# EAGLE board main_board1 (EAGLE 9.2.2)
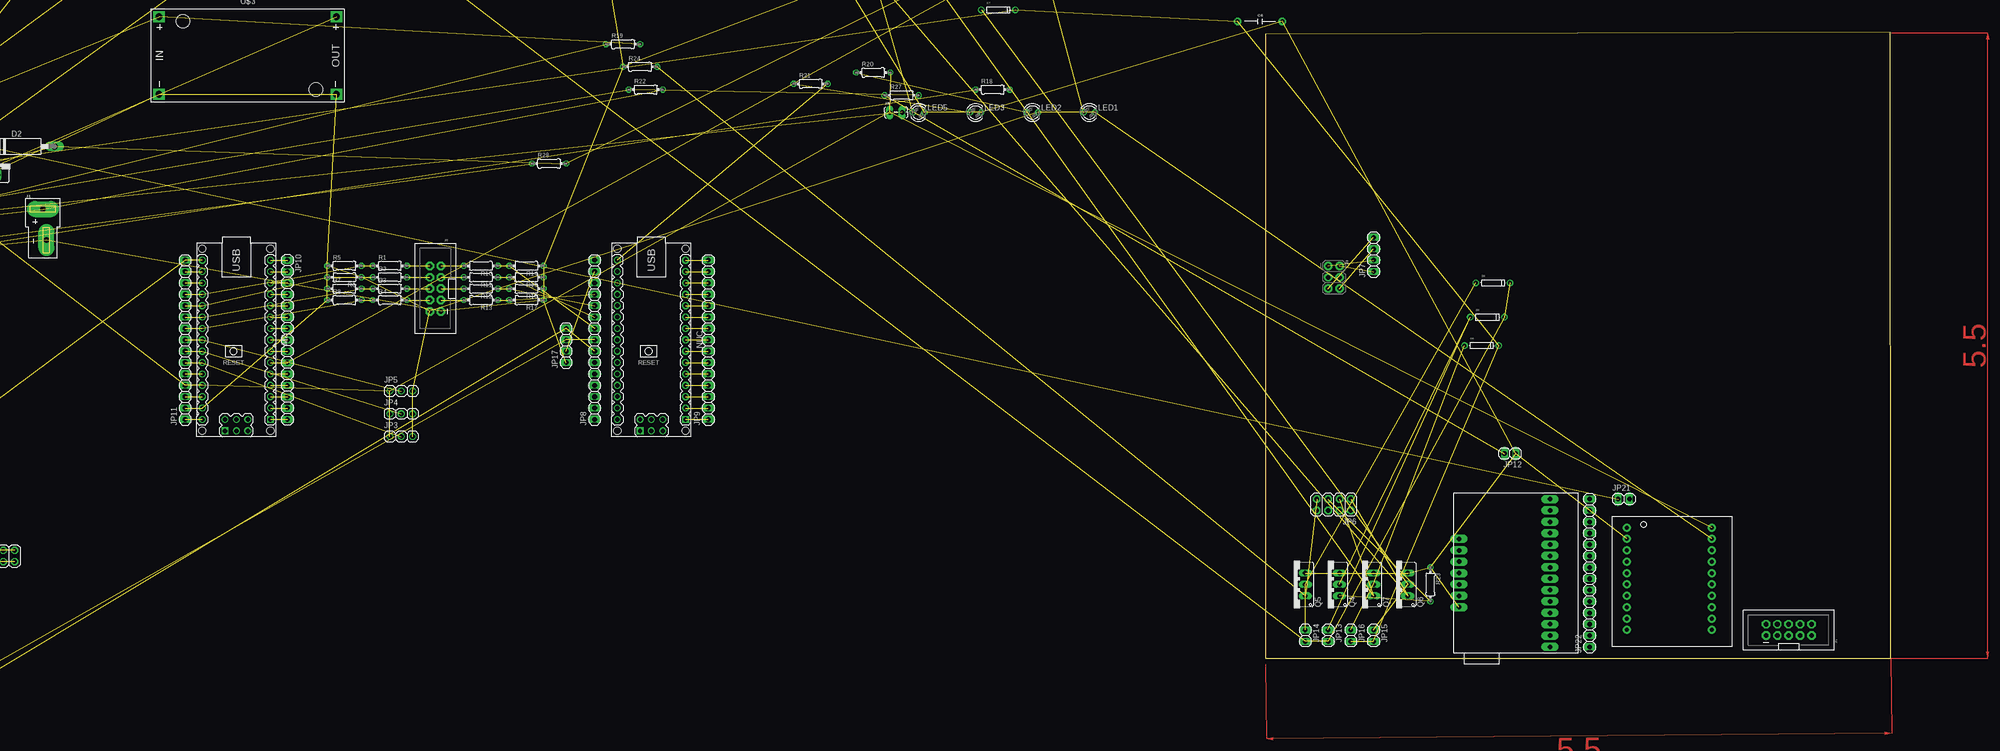
[diagram p0: board, top side]
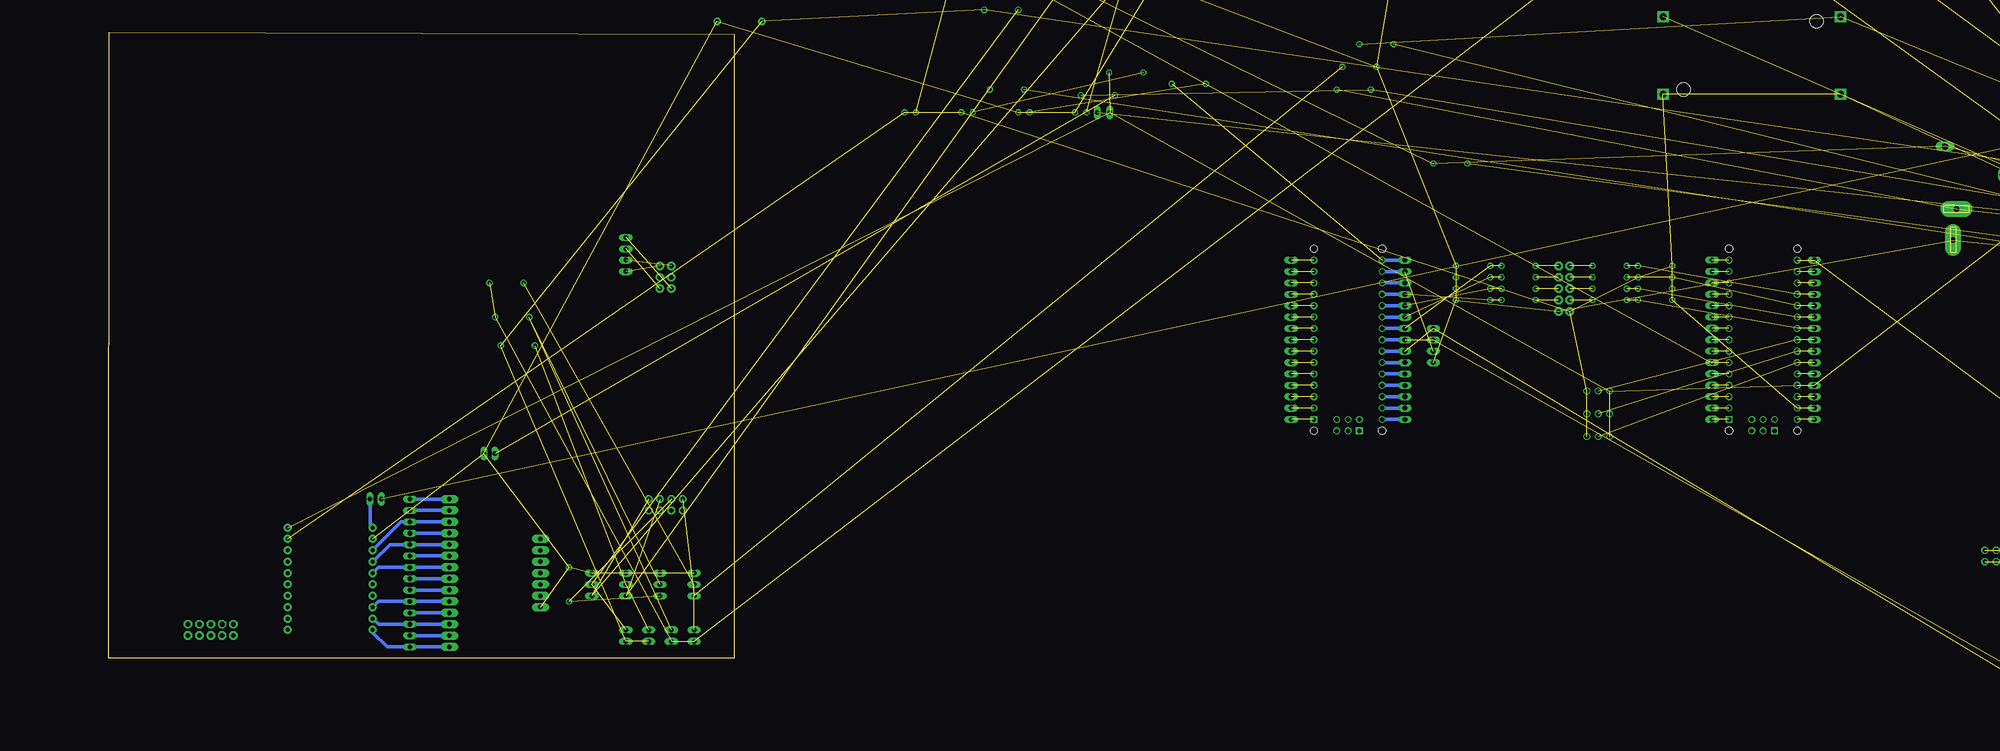
[diagram p1: board, bottom side, seen from below]

Size 415.57 x 139.75 mm. Coordinates in mm from the lower left corner, seen from the top.
Outline: 275.89,0 415.57,0 415.45,139.75 275.89,139.37 275.89,0
Copper layers (1*16): Top 0.035mm / dielectric 1.5mm / Bottom 0.035mm
Design rules "default": minimum track width 6mil, minimum drill 0.35mm, track to track 6mil, track to pad 6mil, pad to pad 6mil, via to via 6mil, smd to smd 6mil, copper to edge 40mil, drill to drill 6mil, minimum pad ring 10mil, minimum via ring 8mil, stop-mask expansion 4mil, vias tented up to drill 0mil, thermal gap 10mil

## Footprints (pad centres in the part's own frame; a part is rotated, then mirrored left to right if it is on the bottom)
CAP-PTH-10MM = drill 0.9 pad 1.651: 1 -5,0; 2 5,0
CB417-15 = drill 1.397 long: A 7.62,0; C -7.62,0
DO-1N4148 = drill 0.9: A -3.81,0; C 3.81,0
78MXXS = drill 1.016 long: GND 0,-2.54; IN -2.54,-2.54; OUT 2.54,-2.54
78XXS = drill 1.016 long: GND 0,-2.54; IN -2.54,-2.54; OUT 2.54,-2.54
DEANS = drill 1.27 pad 3.556 long: + 0,0; - 0.737,-6.921
2X3-NS = drill 1.016 pad 1.88: 1 -2.54,-1.27; 2 -2.54,1.27; 3 0,-1.27; 4 0,1.27; 5 2.54,-1.27; 6 2.54,1.27
1X02_LOCK_LONGPADS = drill 1.016 long: 1 -0.127,0; 2 2.667,0
1X2-3.5MM = drill 1 pad 2.184: 1 1.8,0; 2 -1.7,0
2X5-SHROUDED = drill 1.016 pad 1.88 octagon: 1 -1.27,5.08; 2 1.27,5.08; 3 -1.27,2.54; 4 1.27,2.54; 5 -1.27,0; 6 1.27,0; 7 -1.27,-2.54; 8 1.27,-2.54; 9 -1.27,-5.08; 10 1.27,-5.08
1X03 = drill 1.016: 1 -2.54,0; 2 0,0; 3 2.54,0
2X04 = drill 1.016 pad 1.676 octagon: 1 -3.81,-1.27; 2 -3.81,1.27; 3 -1.27,-1.27; 4 -1.27,1.27; 5 1.27,-1.27; 6 1.27,1.27; 7 3.81,-1.27; 8 3.81,1.27
1X04 = drill 1.016 long: 1 -3.81,0; 2 -1.27,0; 3 1.27,0; 4 3.81,0
1X15 = drill 1.016 long: 1 -17.78,0; 2 -15.24,0; 3 -12.7,0; 4 -10.16,0; 5 -7.62,0; 6 -5.08,0; 7 -2.54,0; 8 0,0; 9 2.54,0; 10 5.08,0; 11 7.62,0; 12 10.16,0; 13 12.7,0; 14 15.24,0; 15 17.78,0
1X02 = drill 1.016 long: 1 -1.27,0; 2 1.27,0
2X05 = drill 1.016 octagon: 1 -5.08,-1.27; 2 -5.08,1.27; 3 -2.54,-1.27; 4 -2.54,1.27; 5 0,-1.27; 6 0,1.27; 7 2.54,-1.27; 8 2.54,1.27; 9 5.08,-1.27; 10 5.08,1.27
1X14 = drill 1.016 long: 1 -16.51,0; 2 -13.97,0; 3 -11.43,0; 4 -8.89,0; 5 -6.35,0; 6 -3.81,0; 7 -1.27,0; 8 1.27,0; 9 3.81,0; 10 6.35,0; 11 8.89,0; 12 11.43,0; 13 13.97,0; 14 16.51,0
LED3MM = drill 0.813 octagon: A -1.27,0; K 1.27,0
ARDUINO-NANO-3.0#ISP = drill 1 square: J1.1 17.78,7.62; J4.1 20.32,-2.54 | drill 1: J1.2 15.24,7.62; J1.3 12.7,7.62; J1.4 10.16,7.62; J1.5 7.62,7.62; J1.6 5.08,7.62; J1.7 2.54,7.62; J1.8 0,7.62; J1.9 -2.54,7.62; J1.10 -5.08,7.62; J1.11 -7.62,7.62; J1.12 -10.16,7.62; J1.13 -12.7,7.62; J1.14 -15.24,7.62; J1.15 -17.78,7.62; J2.1 17.78,-7.62; J2.2 15.24,-7.62; J2.3 12.7,-7.62; J2.4 10.16,-7.62; J2.5 7.62,-7.62; J2.6 5.08,-7.62; J2.7 2.54,-7.62; J2.8 0,-7.62; J2.9 -2.54,-7.62; J2.10 -5.08,-7.62; J2.11 -7.62,-7.62; J2.12 -10.16,-7.62; J2.13 -12.7,-7.62; J2.14 -15.24,-7.62; J2.15 -17.78,-7.62; J4.2 17.78,-2.54; J4.3 20.32,0; J4.4 17.78,0; J4.5 20.32,2.54; J4.6 17.78,2.54 | hole 1.651: -20.32,7.62; -20.32,-7.62; 20.32,-7.62; 20.32,7.62
DIL04 = drill 0.813 offset: 1 -1.27,-3.81; 2 1.27,-3.81; 3 1.27,3.81; 4 -1.27,3.81
TO220V = drill 1.016 long: 1 -2.54,0; 2 0,0; 3 2.54,0
TO92-EBC = drill 0.813 long: B 0,-1.27; C -2.54,-1.27; E 2.54,-1.27
TO220V' = drill 1.016 long: 1 -2.54,-2.54; 2 0,-2.54; 3 2.54,-2.54
0204/7 = drill 0.813 octagon: 1 -3.81,0; 2 3.81,0
DC-DC-STEP-DOWN-LM2596 = drill 1.5 pad 2.5 square: IN+ -19.812,8.636; IN- -19.812,-8.636; OUT+ 19.812,8.636; OUT- 19.812,-8.636 | hole 3: -14.478,7.62; 15.24,-7.62
TSOP3XXX = drill 1 pad 1.93 long: 1 -2.54,0; 2 0,0; 3 5.08,0
SERVO_CONTROLLER = drill 1 pad 1.93 long: 0 6.35,34.29; 1 6.35,31.75; 2 6.35,29.21; 3 6.35,26.67; 4 6.35,24.13; 5 6.35,21.59; 6 6.35,16.51; 7 6.35,13.97; 8 6.35,11.43; 9 6.35,8.89; 10 6.35,6.35; 11 6.35,3.81; +5V(OUT) 6.35,19.05; ERR 26.67,12.7; GND 26.67,25.4; RST' 26.67,15.24; RX 26.67,20.32; TX 26.67,17.78; TXIN 26.67,10.16; VIN 26.67,22.86; VSRV 6.35,1.27
DIGITAL_ISOLATOR_MODULE = drill 0.9 pad 1.778: 1 3.175,26.67; 2 3.175,24.13; 3 3.175,21.59; 4 3.175,19.05; 5 3.175,16.51; 6 3.175,13.97; 7 3.175,11.43; 8 3.175,8.89; 9 3.175,6.35; 10 3.175,3.81; 11 22.225,3.81; 12 22.225,6.35; 13 22.225,8.89; 14 22.225,11.43; 15 22.225,13.97; 16 22.225,16.51; 17 22.225,19.05; 18 22.225,21.59; 19 22.225,24.13; 20 22.225,26.67

## Placement (x,y rotation side)
C6  10nF  [CAP-PTH-10MM]  274.62,142.24 0 top
C7  10nF  [CAP-PTH-10MM]  -119.08,-127 0 top  (outside the outline)
C8  10nF  [CAP-PTH-10MM]  -119.08,-130.81 0 top  (outside the outline)
D2  SCOTTKY  [CB417-15]  -2.24,114.3 0 top
D5  [DO-1N4148]  325.42,76.2 0 top
D6  [DO-1N4148]  326.69,83.82 0 top
D7  [DO-1N4148]  216.2,144.78 0 top  (outside the outline)
D8  [DO-1N4148]  324.15,69.85 0 top
IC2  7812  [78MXXS]  -119.08,-93.98 0 top  (outside the outline)
IC3  [78XXS]  -9.86,110.49 0 top  (outside the outline)
IC4  [78XXS]  -21.29,110.49 0 top  (outside the outline)
IC5  [78XXS]  -32.72,110.49 0 top  (outside the outline)
J1  [DEANS]  2.84,100.33 0 top
J3  [2X3-NS]  291.13,85.09 270 top
J5  [1X02_LOCK_LONGPADS]  192.07,121.92 0 top
J6  1X2-3.5MM  [1X2-3.5MM]  -121.62,-109.22 0 top  (outside the outline)
JP1  M05X2SHD  [2X5-SHROUDED]  392.73,6.35 90 top
JP2  M05X2SHD  [2X5-SHROUDED]  90.47,82.55 180 top
JP3  [1X03]  82.85,49.53 0 top
JP4  [1X03]  82.85,54.61 0 top
JP5  Temp Sensor  [1X03]  82.85,59.69 0 top
JP6  [2X04]  291.13,34.29 180 top
JP7  [1X04]  300.02,90.17 90 top
JP8  [1X15]  126.03,71.12 90 top
JP9  [1X15]  151.43,71.12 90 top
JP10  [1X15]  57.45,71.12 270 top
JP11  [1X15]  34.59,71.12 90 top
JP12  [1X02]  330.5,45.72 180 top
JP13  [1X02]  289.86,5.08 270 top
JP14  [1X02]  284.78,5.08 270 top
JP15  [1X02]  300.02,5.08 270 top
JP16  [1X02]  294.94,5.08 270 top
JP17  [1X04]  119.68,69.85 90 top
JP18  Extra Reed  [1X02]  -105.11,-21.59 0 top  (outside the outline)
JP19  [2X05]  -8.59,22.86 0 top  (outside the outline)
JP20  [2X05]  -101.3,-38.1 0 top  (outside the outline)
JP21  [1X02]  355.9,35.56 0 top
JP22  [1X14]  348.28,19.05 90 top
JP23  [1X02]  -121.62,-123.19 0 top  (outside the outline)
LED1  LED3MM  [LED3MM]  236.52,121.92 0 top
LED2  LED3MM  [LED3MM]  223.82,121.92 0 top
LED3  LED3MM  [LED3MM]  211.12,121.92 0 top
LED4  LED3MM  [LED3MM]  -105.11,-5.08 0 top  (outside the outline)
LED5  LED3MM  [LED3MM]  198.42,121.92 0 top
LED6  LED3MM  [LED3MM]  -114,-53.34 0 top  (outside the outline)
M2  ARDUINO-NANO-3.0#ISP  [ARDUINO-NANO-3.0#ISP]  46.02,71.12 270 top
NUC  [ARDUINO-NANO-3.0#ISP]  138.73,71.12 270 top
OC_EN  SFH610  [DIL04]  -16.21,95.25 0 top  (outside the outline)
OC_POW  SFH610  [DIL04]  -26.37,95.25 0 top  (outside the outline)
Q1  MOSFET-PCHANNELFQP27P06  [TO220V]  -67.01,92.71 0 top  (outside the outline)
Q2  MOSFET-PCHANNELFQP27P06  [TO220V]  -97.49,92.71 0 top  (outside the outline)
Q3  BC548  [TO92-EBC]  -114,-35.56 0 top  (outside the outline)
Q4  [TO220V']  289.86,16.51 90 top
Q5  [TO220V']  282.24,16.51 90 top
Q6  [TO220V']  305.1,16.51 90 top
Q7  [TO220V']  297.48,16.51 90 top
R1  [0204/7]  80.31,87.63 0 top
R2  [0204/7]  80.31,85.09 0 top
R3  [0204/7]  80.31,82.55 0 top
R4  [0204/7]  80.31,80.01 0 top
R5  [0204/7]  70.15,87.63 0 top
R6  [0204/7]  70.15,85.09 180 top
R7  [0204/7]  70.15,82.55 0 top
R8  [0204/7]  70.15,80.01 0 top
R9  [0204/7]  222.55,154.94 180 top  (outside the outline)
R10  [0204/7]  100.63,87.63 180 top
R11  [0204/7]  100.63,85.09 180 top
R12  [0204/7]  100.63,82.55 180 top
R13  [0204/7]  100.63,80.01 180 top
R14  [0204/7]  110.79,87.63 180 top
R15  [0204/7]  110.79,85.09 180 top
R16  [0204/7]  110.79,82.55 180 top
R17  [0204/7]  110.79,80.01 180 top
R18  [0204/7]  214.93,127 0 top
R19  [0204/7]  132.38,137.16 0 top
R20  [0204/7]  188.26,130.81 0 top
R21  [0204/7]  174.29,128.27 0 top
R22  [0204/7]  137.46,127 0 top
R23  [0204/7]  312.72,16.51 270 top
R24  [0204/7]  136.19,132.08 0 top
R25  [0204/7]  185.72,151.13 0 top  (outside the outline)
R26  [0204/7]  190.8,161.29 0 top  (outside the outline)
R27  [0204/7]  194.61,125.73 0 top
R28  [0204/7]  115.87,110.49 0 top
R29  [0204/7]  193.34,148.59 0 top  (outside the outline)
R30  [0204/7]  -102.57,-10.16 0 top  (outside the outline)
R31  [0204/7]  -112.73,-44.45 0 top  (outside the outline)
R32  [0204/7]  -112.73,-49.53 0 top  (outside the outline)
R33  [0204/7]  -112.73,-58.42 0 top  (outside the outline)
R34  [0204/7]  -112.73,-63.5 0 top  (outside the outline)
U$1  DC-DC-STEP-DOWN-LM2596  [DC-DC-STEP-DOWN-LM2596]  53.64,204.47 180 top  (outside the outline)
U$2  DC-DC-STEP-DOWN-LM2596  [DC-DC-STEP-DOWN-LM2596]  101.9,204.47 0 top  (outside the outline)
U$3  DC-DC-STEP-DOWN-LM2596  [DC-DC-STEP-DOWN-LM2596]  48.56,134.62 0 top
U$5  TSOP34X  [TSOP3XXX]  -37.8,93.98 0 top  (outside the outline)
U$6  SERVO_CONTROLLER  [SERVO_CONTROLLER]  345.74,36.83 180 top
U$7  DIGITAL_ISOLATOR  [DIGITAL_ISOLATOR_MODULE]  353.36,2.54 0 top

## Library data of the parts
C6-C8 = SparkFun-Capacitors; PROD_ID: CAP-09321
D2 D5-D8 J6 JP3-JP6 JP8-JP11 Q4-Q7 = adafruit
IC2-IC5 = v-reg
J1 = SparkFun-Connectors; SF_ID: PRT-11864
J3 J5 JP1 JP2 = SparkFun-Connectors
JP7 JP12-JP23 = pinhead
LED1-LED6 U$5 = CEDT_JANUARY_2015_v5
M2 NUC U$1-U$3 = diy-modules
OC_EN OC_POW = optocoupler; MF: VISHAY/TELEFUNKEN; MPN: SFH6106-4; OC_FARNELL: 1469568; OC_NEWARK: 58K2193
Q1 Q2 = SparkFun-DiscreteSemi
Q3 = transistor-npn
R1-R34 = rcl; SPICEPREFIX: R
U$6 = Servo Controller
U$7 = ISO7330C DIGITAL ISOLATOR MODULE

## Nets
DR1: JP6.1 Q6.1 R25.2
DR1_IN: JP6.2
DR2: JP6.3 Q7.1 R26.2
DR2_IN: JP6.4
E16.8V: Q2.2 Q2.3 R19.2 U$3.IN+
EA0: JP11.12 M2.J2.12 R1.1 R5.2
EA1: JP11.11 M2.J2.11 R2.1 R6.2
EA2: JP11.10 M2.J2.10 R3.1 R7.2
EA3: JP11.9 M2.J2.9 R4.1 R8.2
ED3: JP10.10 M2.J1.6 R9.2
EN: J5.2 OC_EN.4 R31.2
ENLED: R18.2
GNDE: IC3.GND JP2.2 JP3.3 JP4.3 JP5.3 JP11.2 LED1.K LED2.K LED4.K M2.J2.2 OC_POW.4 Q3.E R5.1 R6.1 R7.1 R8.1 U$3.IN- U$3.OUT- U$7.19
GNDN: C6.2 C7.2 C8.2 IC2.GND IC4.GND IC5.GND J1.- J6.2 JP2.1 JP12.1 JP17.1 JP18.1 JP19.2 JP19.4 JP19.6 JP19.8 JP19.10 JP20.2 JP20.4 JP20.6 JP20.8 JP20.10 LED3.K LED5.K OC_EN.2 OC_POW.2 Q4.3 Q5.3 Q6.3 Q7.3 R14.1 R15.1 R16.1 R17.1 R23.1 R24.1 R25.1 R26.1 U$1.IN- U$1.OUT- U$2.IN- U$2.OUT- U$5.1 U$6.GND U$7.2
GR1_IN: J3.3
GR2_IN: J3.4
N6V: C6.1 D7.C D8.C IC5.OUT JP15.2 JP16.2
N12V: D5.C D6.C IC5.IN JP13.2 JP14.2 JP20.1 JP20.3 JP20.5 JP20.7 JP20.9 U$1.OUT+
N$1: JP10.11 M2.J1.5
N$2: OC_EN.1 R18.1
N$4: JP9.1 NUC.J1.1
N$5: JP9.2 NUC.J1.2
N$6: JP9.3 NUC.J1.3
N$7: LED1.A R9.1
N$8: JP2.10 R1.2
N$9: JP2.8 R2.2
N$10: JP2.6 R3.2
N$11: JP2.4 R4.2
N$12: JP8.7 JP17.4 NUC.J2.7 R34.2
N$13: JP8.8 JP17.3 NUC.J2.8 R33.2
N$14: JP9.4 NUC.J1.4
N$15: JP9.5 NUC.J1.5
N$16: JP2.9 R10.2
N$17: JP2.7 R11.2
N$18: JP2.5 R12.2
N$19: JP2.3 R13.2
N$20: JP9.6 NUC.J1.6
N$21: OC_POW.3 Q2.1 R19.1
N$22: JP9.7 NUC.J1.7
N$23: IC3.IN U$3.OUT+
N$24: JP22.10 U$6.8 U$7.4
N$26: LED2.A R20.1
N$31: Q3.B R31.1
N$32: D2.C JP21.1
N$34: JP9.8 NUC.J1.8
N$35: JP22.1 U$6.0 U$7.10
N$36: C7.1 IC2.IN J1.+ Q1.3 R22.2
N$37: C8.1 IC2.OUT J6.1
N$38: JP22.2 U$6.1
N$39: JP9.9 NUC.J1.9
N$40: JP9.10 NUC.J1.10
N$41: LED4.A R30.1
N$42: JP11.1 M2.J2.1
N$43: JP9.11 NUC.J1.11
N$44: JP9.12 NUC.J1.12
N$45: JP9.13 NUC.J1.13
N$46: JP9.14 NUC.J1.14
N$47: JP8.4 NUC.J2.4
N$48: JP9.15 NUC.J1.15
N$49: JP22.3 U$6.2 U$7.9
N$50: J3.6 JP7.3
N$51: J3.2 JP7.1
N$52: J3.1 JP7.2
N$53: J3.5 JP7.4
N$54: JP8.1 NUC.J2.1
N$55: JP8.2 NUC.J2.2
N$56: JP8.3 NUC.J2.3
N$57: JP21.2 U$7.1
N$58: JP8.5 NUC.J2.5
N$59: JP8.6 NUC.J2.6
N$60: JP22.4 U$6.3
N$61: JP22.5 U$6.4 U$7.8
N$62: JP8.13 NUC.J2.13
N$63: JP8.14 JP17.2 NUC.J2.14
N$64: JP8.15 NUC.J2.15 R21.2
N$65: LED3.A R21.1
N$66: JP22.6 U$6.5
N$67: JP22.7 U$6.+5V(OUT)
N$68: JP22.8 U$6.6 U$7.5
N$69: JP22.9 U$6.7
N$70: Q1.1 R22.1 R27.2
N$72: JP22.11 U$6.9
N$73: JP22.12 U$6.10 U$7.3
N$74: JP22.13 U$6.11
N$75: JP10.1 M2.J1.15
N$76: JP10.2 M2.J1.14
N$77: JP10.3 M2.J1.13
N$78: JP10.4 M2.J1.12
N$79: JP10.5 M2.J1.11
N$80: JP10.6 M2.J1.10
N$81: JP10.7 M2.J1.9
N$82: JP10.8 M2.J1.8
N$83: JP10.9 M2.J1.7
N$84: JP22.14 U$6.VSRV
N$85: JP10.12 M2.J1.4
N$86: JP10.13 M2.J1.3
N$87: JP10.14 M2.J1.2
N$88: JP10.15 M2.J1.1
N$89: JP11.15 M2.J2.15 R30.2
N$90: JP11.14 M2.J2.14
N$91: JP11.13 M2.J2.13
N$93: JP11.3 M2.J2.3
N$95: D5.A JP13.1 Q4.2
N$96: D6.A JP14.1 Q5.2
N$97: JP12.2 R27.1
N$98: D7.A JP15.1 Q6.2
N$99: D8.A JP16.1 Q7.2
N$100: IC4.IN U$2.OUT+
N$101: OC_POW.1 R28.1
N$102: Q1.2 U$1.IN+ U$2.IN+
N$104: LED5.A R29.1
N$106: LED6.K Q3.C
N$107: LED6.A R32.2
NA0: JP8.12 NUC.J2.12 R13.1 R17.2
NA1: JP8.11 NUC.J2.11 R12.1 R16.2
NA2: JP8.10 NUC.J2.10 R11.1 R15.2
NA3: JP8.9 NUC.J2.9 R10.1 R14.2
NTSOP: U$5.3
TMP1: JP5.2 JP11.8 M2.J2.8
TMP2: JP4.2 JP11.7 M2.J2.7
TMP3: JP3.2 JP11.6 M2.J2.6
TMP4: JP11.5 M2.J2.5
TP1: JP6.5 Q4.1 R23.2
TP1_IN: JP6.6
TP2: JP6.7 Q5.1 R24.2
TP2_IN: JP6.8
VCCE: IC3.OUT J5.1 JP3.1 JP4.1 JP5.1 JP11.4 JP23.1 JP23.2 M2.J2.4 OC_EN.3 R20.2 R32.1 U$7.20
VCCN: D2.A IC4.OUT JP19.1 JP19.3 JP19.5 JP19.7 JP19.9 R28.2 R29.2 R33.1 R34.1 U$5.2

## Tracks (layer width: path | path; a pad name or v marks a point on that pad's centre or on a via)
DR1  (2 unrouted)
DR2  (2 unrouted)
E16.8V  (3 unrouted)
EA0  (3 unrouted)
EA1  (3 unrouted)
EA2  (3 unrouted)
EA3  (3 unrouted)
ED3  (2 unrouted)
EN  (2 unrouted)
GNDE  (18 unrouted)
GNDN  (44 unrouted)
N6V  (5 unrouted)
N12V  (10 unrouted)
N$1  (1 unrouted)
N$2  (1 unrouted)
N$4  (1 unrouted)
N$5  (1 unrouted)
N$6  (1 unrouted)
N$7  (1 unrouted)
N$8  (1 unrouted)
N$9  (1 unrouted)
N$10  (1 unrouted)
N$11  (1 unrouted)
N$12  (2 unrouted)
  Bottom 0.813: NUC.J2.7 JP8.7
N$13  (2 unrouted)
  Bottom 0.813: JP8.8 NUC.J2.8
N$14  (1 unrouted)
N$15  (1 unrouted)
N$16  (1 unrouted)
N$17  (1 unrouted)
N$18  (1 unrouted)
N$19  (1 unrouted)
N$20  (1 unrouted)
N$21  (2 unrouted)
N$22  (1 unrouted)
N$23  (1 unrouted)
N$24
  Bottom 0.813: U$6.8 JP22.10 352.73,25.4 U$7.4
N$26  (1 unrouted)
N$31  (1 unrouted)
N$32  (1 unrouted)
N$34  (1 unrouted)
N$35
  Bottom 0.813: U$6.0 JP22.1 353.36,2.54 356.54,5.72 U$7.10
N$36  (4 unrouted)
N$37  (2 unrouted)
N$38
  Bottom 0.813: U$6.1 JP22.2
N$39  (1 unrouted)
N$40  (1 unrouted)
N$41  (1 unrouted)
N$42  (1 unrouted)
N$43  (1 unrouted)
N$44  (1 unrouted)
N$45  (1 unrouted)
N$46  (1 unrouted)
N$47
  Bottom 0.813: JP8.4 NUC.J2.4
N$48  (1 unrouted)
N$49
  Bottom 0.813: U$6.2 JP22.3 355.27,7.62 U$7.9
N$50  (1 unrouted)
N$51  (1 unrouted)
N$52  (1 unrouted)
N$53  (1 unrouted)
N$54
  Bottom 0.813: JP8.1 NUC.J2.1
N$55
  Bottom 0.813: NUC.J2.2 JP8.2
N$56
  Bottom 0.813: NUC.J2.3 JP8.3
N$57
  Bottom 0.813: U$7.1 357.17,29.84 JP21.2
N$58
  Bottom 0.813: NUC.J2.5 JP8.5
N$59
  Bottom 0.813: JP8.6 NUC.J2.6
N$60
  Bottom 0.813: U$6.3 JP22.4
N$61
  Bottom 0.813: U$6.4 JP22.5 355.27,12.7 U$7.8
N$62
  Bottom 0.813: JP8.13 NUC.J2.13
N$63  (1 unrouted)
  Bottom 0.813: NUC.J2.14 JP8.14
N$64  (1 unrouted)
  Bottom 0.813: JP8.15 NUC.J2.15
N$65  (1 unrouted)
N$66
  Bottom 0.813: U$6.5 JP22.6
N$67
  Bottom 0.813: U$6.+5V(OUT) JP22.7
N$68
  Bottom 0.813: U$6.6 JP22.8 355.27,20.32 U$7.5
N$69
  Bottom 0.813: U$6.7 JP22.9
N$70  (2 unrouted)
N$72
  Bottom 0.813: U$6.9 JP22.11
N$73
  Bottom 0.813: U$6.10 JP22.12 350.19,30.48 U$7.3
N$74
  Bottom 0.813: U$6.11 JP22.13
N$75  (1 unrouted)
N$76  (1 unrouted)
N$77  (1 unrouted)
N$78  (1 unrouted)
N$79  (1 unrouted)
N$80  (1 unrouted)
N$81  (1 unrouted)
N$82  (1 unrouted)
N$83  (1 unrouted)
N$84
  Bottom 0.813: U$6.VSRV JP22.14
N$85  (1 unrouted)
N$86  (1 unrouted)
N$87  (1 unrouted)
N$88  (1 unrouted)
N$89  (2 unrouted)
N$90  (1 unrouted)
N$91  (1 unrouted)
N$93  (1 unrouted)
N$95  (2 unrouted)
N$96  (2 unrouted)
N$97  (1 unrouted)
N$98  (2 unrouted)
N$99  (2 unrouted)
N$100  (1 unrouted)
N$101  (1 unrouted)
N$102  (2 unrouted)
N$104  (1 unrouted)
N$106  (1 unrouted)
N$107  (1 unrouted)
NA0  (2 unrouted)
  Bottom 0.813: NUC.J2.12 JP8.12
NA1  (2 unrouted)
  Bottom 0.813: JP8.11 NUC.J2.11
NA2  (2 unrouted)
  Bottom 0.813: JP8.10 NUC.J2.10
NA3  (2 unrouted)
  Bottom 0.813: NUC.J2.9 JP8.9
TMP1  (2 unrouted)
TMP2  (2 unrouted)
TMP3  (2 unrouted)
TMP4  (1 unrouted)
TP1  (2 unrouted)
TP2  (2 unrouted)
VCCE  (12 unrouted)
VCCN  (11 unrouted)
(copper drawn outside any net)
  shapes: Top area x2